# EAGLE board v0.1 (EAGLE 9.3.2)
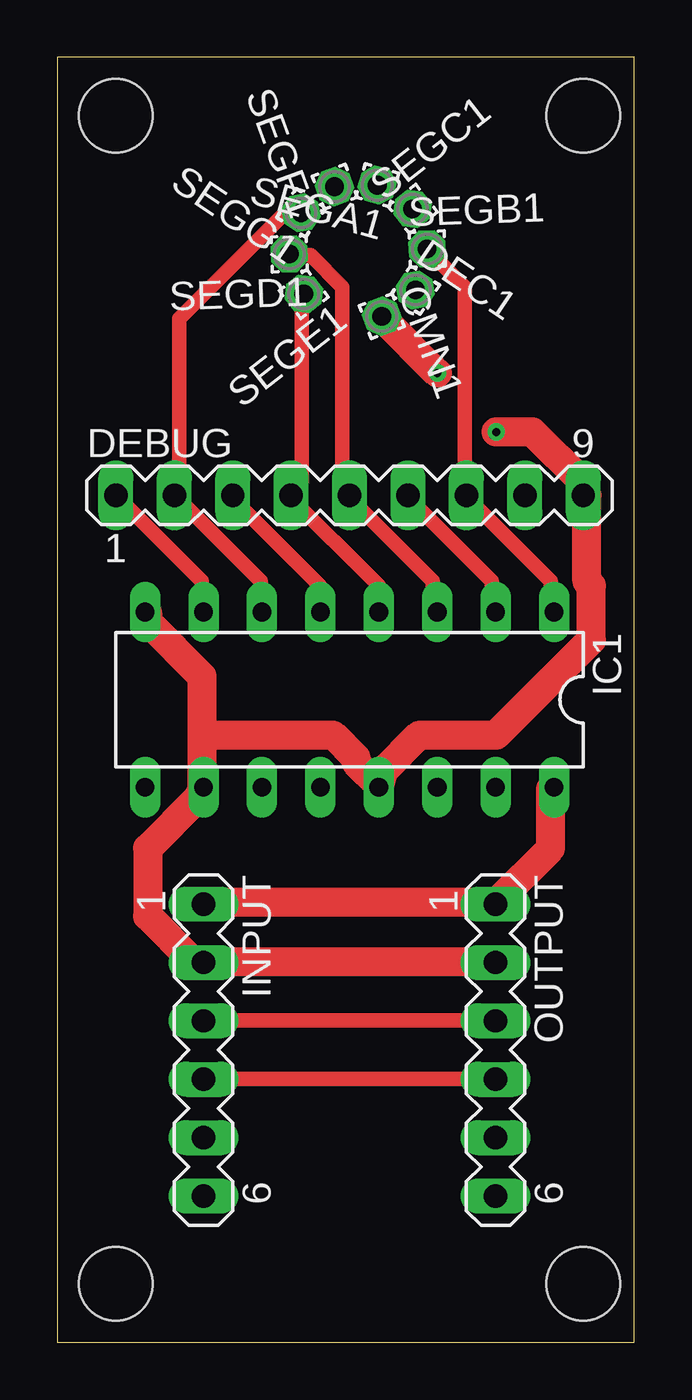
[diagram p0: board, top side]
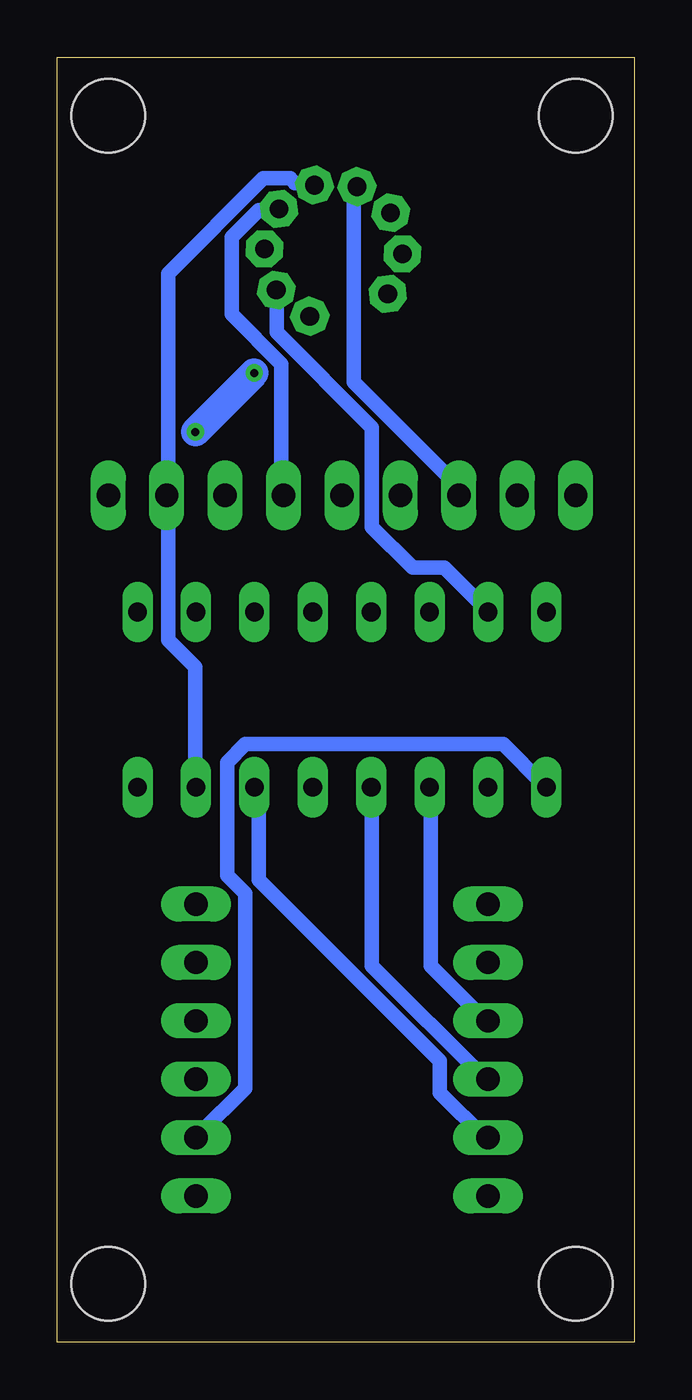
[diagram p1: board, bottom side, seen from below]

Size 25.07 x 55.87 mm. Coordinates in mm from the lower left corner, seen from the top.
Outline: 0,0 25.07,0 25.07,55.87 0,55.87 0,0
Copper layers (1*16): Top 0.035mm / dielectric 1.5mm / Bottom 0.035mm
Design rules "default": minimum track width 6mil, minimum drill 0.35mm, track to track 6mil, track to pad 6mil, pad to pad 6mil, via to via 6mil, smd to smd 6mil, copper to edge 40mil, drill to drill 6mil, minimum pad ring 10mil, minimum via ring 8mil, stop-mask expansion 4mil, vias tented up to drill 0mil, thermal gap 10mil
Net classes: 0 default: width 0.635 mm; 1 ground: width 1.27 mm; 2 vcc: width 1.27 mm; 3 audio: width 1.27 mm
Holes 3.2 mm at 2.54,53.34 22.86,53.34 22.86,2.54 2.54,2.54

## Footprints (pad centres in the part's own frame; a part is rotated, then mirrored left to right if it is on the bottom)
1,6/0,8 = drill 0.813 pad 1.6 octagon: 1 0,0
MA09-1 = drill 1.016 long: 1 -10.16,0; 2 -7.62,0; 3 -5.08,0; 4 -2.54,0; 5 0,0; 6 2.54,0; 7 5.08,0; 8 7.62,0; 9 10.16,0
DIL16 = drill 0.813 long: 1 -8.89,-3.81; 2 -6.35,-3.81; 3 -3.81,-3.81; 4 -1.27,-3.81; 5 1.27,-3.81; 6 3.81,-3.81; 7 6.35,-3.81; 8 8.89,-3.81; 9 8.89,3.81; 10 6.35,3.81; 11 3.81,3.81; 12 1.27,3.81; 13 -1.27,3.81; 14 -3.81,3.81; 15 -6.35,3.81; 16 -8.89,3.81
MA06-1 = drill 1.016 long: 1 -6.35,0; 2 -3.81,0; 3 -1.27,0; 4 1.27,0; 5 3.81,0; 6 6.35,0

## Placement (x,y rotation side)
CMN1  [1,6/0,8]  14.1,44.62 290 top
DEBUG  [MA09-1]  12.7,36.83 0 top
DEC1  [1,6/0,8]  15.56,45.76 326 top
IC1  74LS595N  [DIL16]  12.7,27.94 180 top
INPUT  [MA06-1]  6.35,12.7 270 top
OUTPUT  [MA06-1]  19.05,12.7 270 top
SEGA1  [1,6/0,8]  13.9,50.32 164 top
SEGB1  [1,6/0,8]  16.07,47.54 2 top
SEGC1  [1,6/0,8]  15.44,49.28 38 top
SEGD1  [1,6/0,8]  10.08,47.33 182 top
SEGE1  [1,6/0,8]  10.71,45.59 218 top
SEGF1  [1,6/0,8]  12.05,50.25 110 top
SEGG1  [1,6/0,8]  10.59,49.11 146 top

## Library data of the parts
CMN1 DEC1 SEGA1 SEGB1 SEGC1 SEGD1 SEGE1 SEGF1 SEGG1 = wirepad
DEBUG INPUT OUTPUT = con-lstb; OC_FARNELL: unknown; OC_NEWARK: unknown
IC1 = 74xx-eu

## Nets
GND [ground]: CMN1.1 DEBUG.9 IC1.8 IC1.10 IC1.13 INPUT.2 OUTPUT.2
N$1: DEBUG.8 IC1.15 SEGA1.1
N$2: DEBUG.7 IC1.1 SEGB1.1
N$3: DEBUG.6 IC1.2 SEGC1.1
N$4: DEBUG.5 IC1.3 SEGD1.1
N$5: DEBUG.4 IC1.4 SEGE1.1
N$6: DEBUG.3 IC1.5 SEGF1.1
N$7: DEBUG.2 IC1.6 SEGG1.1
N$8: DEBUG.1 DEC1.1 IC1.7
N$9: IC1.9 OUTPUT.5
RCK: IC1.12 INPUT.4 OUTPUT.4
RX: IC1.14 INPUT.5
SCK: IC1.11 INPUT.3 OUTPUT.3
VCC [vcc]: IC1.16 INPUT.1 OUTPUT.1

## Tracks (layer width: path | path; a pad name or v marks a point on that pad's centre or on a via)
GND  (via drill 0.35)
  Top 1.27: 6.28,26.4 6.28,28.96 3.92,31.32 3.92,31.71 IC1.8 | 6.28,26.4 6.28,24.23 IC1.10 6.08,23.64 3.92,21.48 3.92,18.52 5.89,16.55 6.28,16.55 INPUT.2 6.87,16.55 18.88,16.55 OUTPUT.2 | 6.28,26.4 11.99,26.4 12.97,25.41 12.97,25.22 13.96,24.23 IC1.13 14.15,24.82 15.73,26.4 19.08,26.4 23.21,30.53 23.21,32.89 23.01,33.09 23.01,36.83 DEBUG.9 22.82,37.42 20.65,39.59 v19.08,39.59 | v16.52,42.15 14.15,44.51 CMN1.1
  Bottom 1.27: v19.08,39.59 v16.52,42.15
N$1
  Bottom 0.635: IC1.15 19.08,24.23 19.08,29.35 20.26,30.53 20.26,36.83 DEBUG.8 20.26,37.03 20.26,46.48 16.12,50.61 14.94,50.61 14.75,50.41 13.96,50.41 SEGA1.1
N$2
  Top 0.635: IC1.1 21.44,31.91 21.44,33.09 17.7,36.83 DEBUG.7 17.7,37.03 17.7,45.88 16.12,47.46 SEGB1.1
N$3
  Top 0.635: IC1.2 18.88,31.91 18.88,33.09 15.14,36.83 DEBUG.6
  Bottom 0.635: SEGC1.1 15.53,49.23 16.32,49.23 17.5,48.05 17.5,44.7 15.34,42.54 15.34,36.83 DEBUG.6
N$4
  Top 0.635: IC1.3 16.32,31.91 16.32,33.09 12.58,36.83 DEBUG.5 12.38,37.03 12.38,45.88 11.01,47.26 10.22,47.26 SEGD1.1
N$5
  Top 0.635: IC1.4 13.96,31.91 13.96,32.89 10.02,36.83 DEBUG.4 10.22,37.03 10.61,37.42 10.61,45.49 SEGE1.1
N$6
  Top 0.635: IC1.5 11.4,31.91 11.4,32.89 7.46,36.83 DEBUG.3
  Bottom 0.635: SEGF1.1 12.19,50.22 12.19,41.75 7.66,37.22 7.66,36.83 DEBUG.3
N$7
  Top 0.635: IC1.6 8.84,31.91 8.84,33.09 5.1,36.83 DEBUG.2 5.3,37.03 5.3,44.51 9.82,49.04 10.41,49.04 SEGG1.1
N$8
  Top 0.635: DEBUG.1 6.28,33.09 6.28,31.91 IC1.7
  Bottom 0.635: DEC1.1 15.53,45.69 15.53,43.92 11.4,39.78 11.4,35.45 9.63,33.68 8.25,33.68 6.48,31.91 IC1.7
N$9
  Bottom 0.635: IC1.9 3.92,24.23 5.69,26 16.91,26 17.7,25.22 17.7,20.3 16.91,19.51 16.91,11.04 18.88,9.07 OUTPUT.5
RCK
  Top 0.635: OUTPUT.4 18.88,11.44 6.48,11.44 INPUT.4
  Bottom 0.635: IC1.12 11.4,24.04 11.4,16.36 6.48,11.44 INPUT.4
RX
  Bottom 0.635: IC1.14 16.32,24.04 16.32,20.1 8.45,12.22 8.45,10.85 6.48,8.88 INPUT.5
SCK
  Top 0.635: OUTPUT.3 18.88,14 6.48,14 INPUT.3
  Bottom 0.635: IC1.11 8.84,24.04 8.84,16.36 6.48,14 INPUT.3
VCC
  Top 1.27: IC1.16 21.44,24.04 21.44,21.48 19.08,19.11 OUTPUT.1 18.48,19.11 6.48,19.11 INPUT.1

## Text on the board
tDocu: Numitron v0.1